# Altium PCB Altimeter_Board.PcbDoc
Units mm, origin at the board's own origin, x right, y up, seen from the top; angles counter-clockwise.
Board outline 30 x 17.5 mm, 4 copper layers (TOP, GND, PWR, BOTTOM), stack 1.021 mm thick; 50 components, 30 nets, 220 pads, 72 vias.
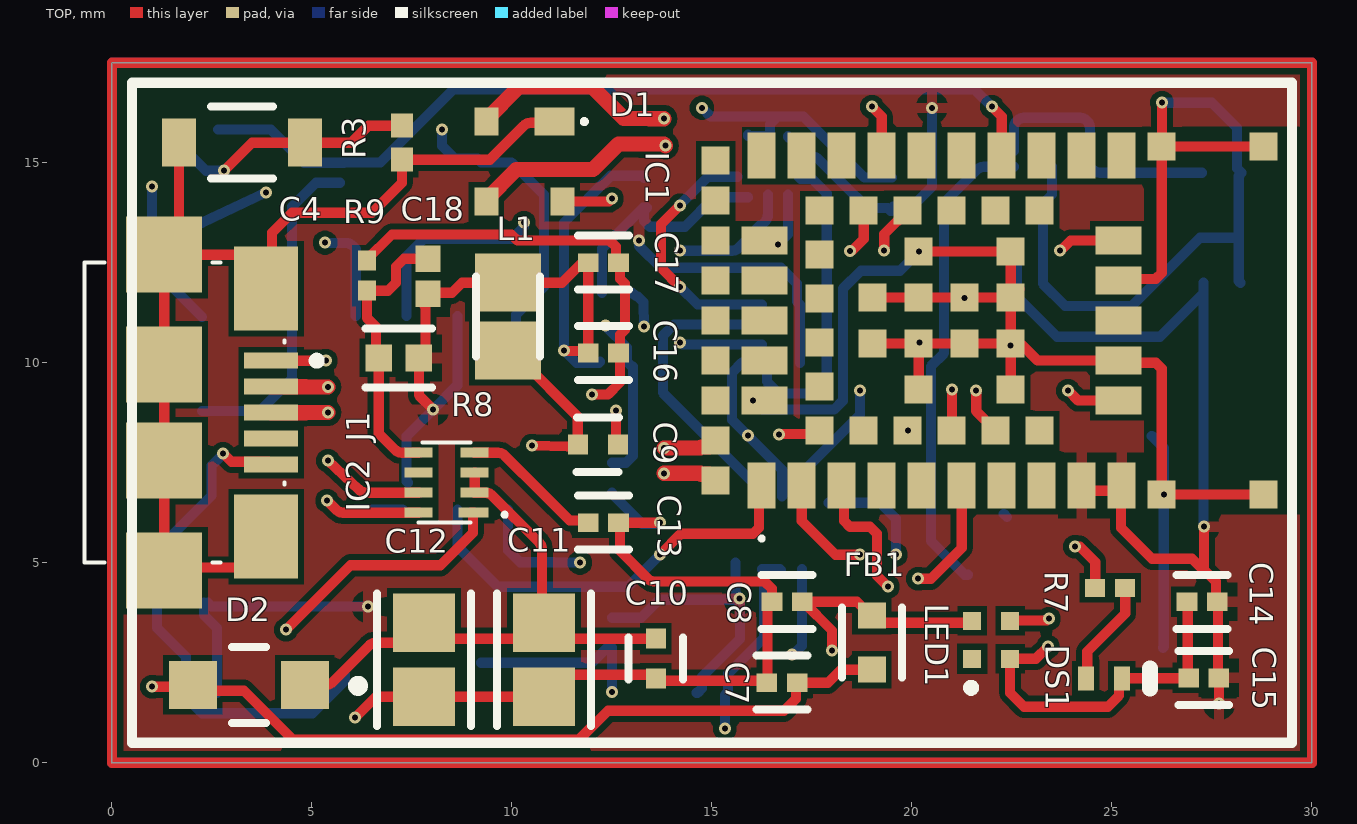
[diagram p0: TOP view]
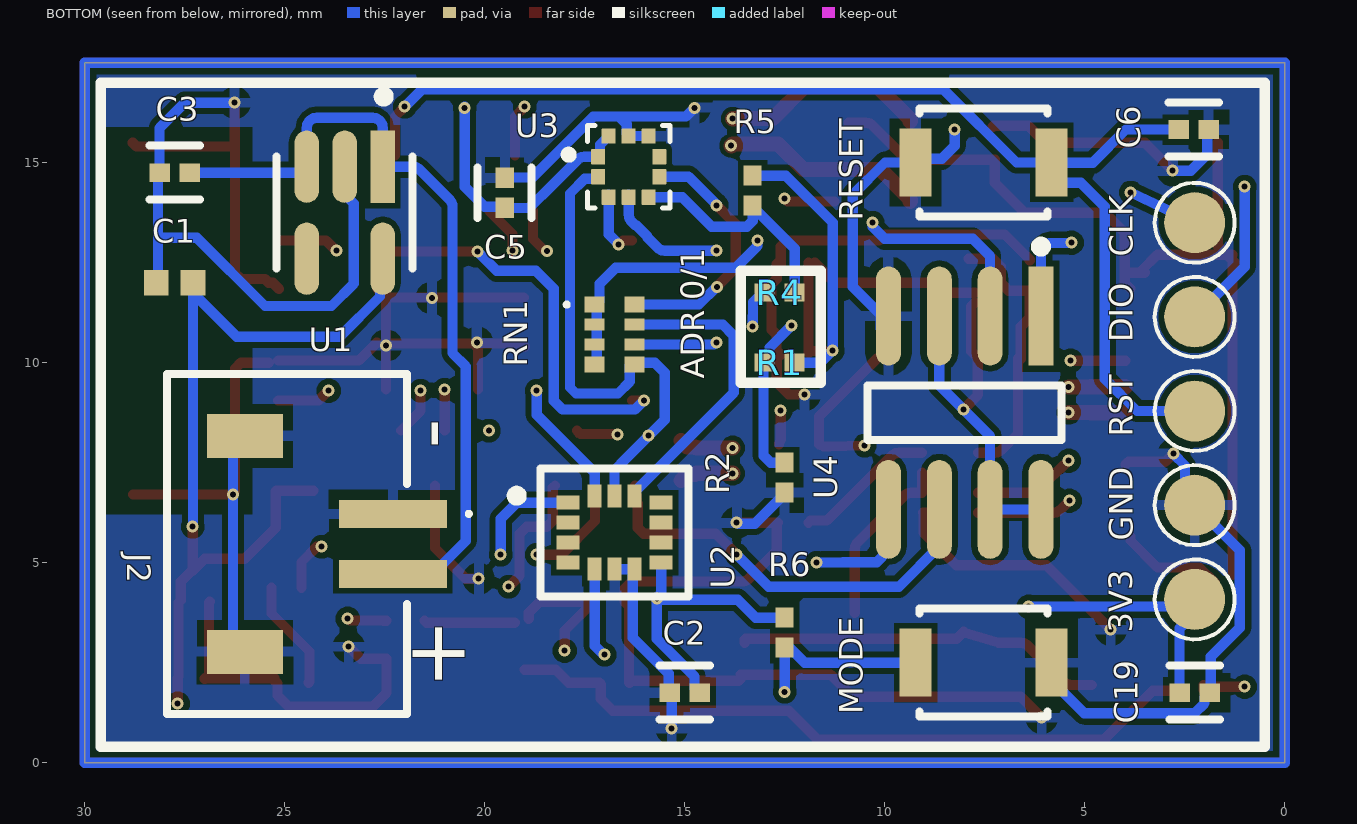
[diagram p1: BOTTOM view, seen from below]
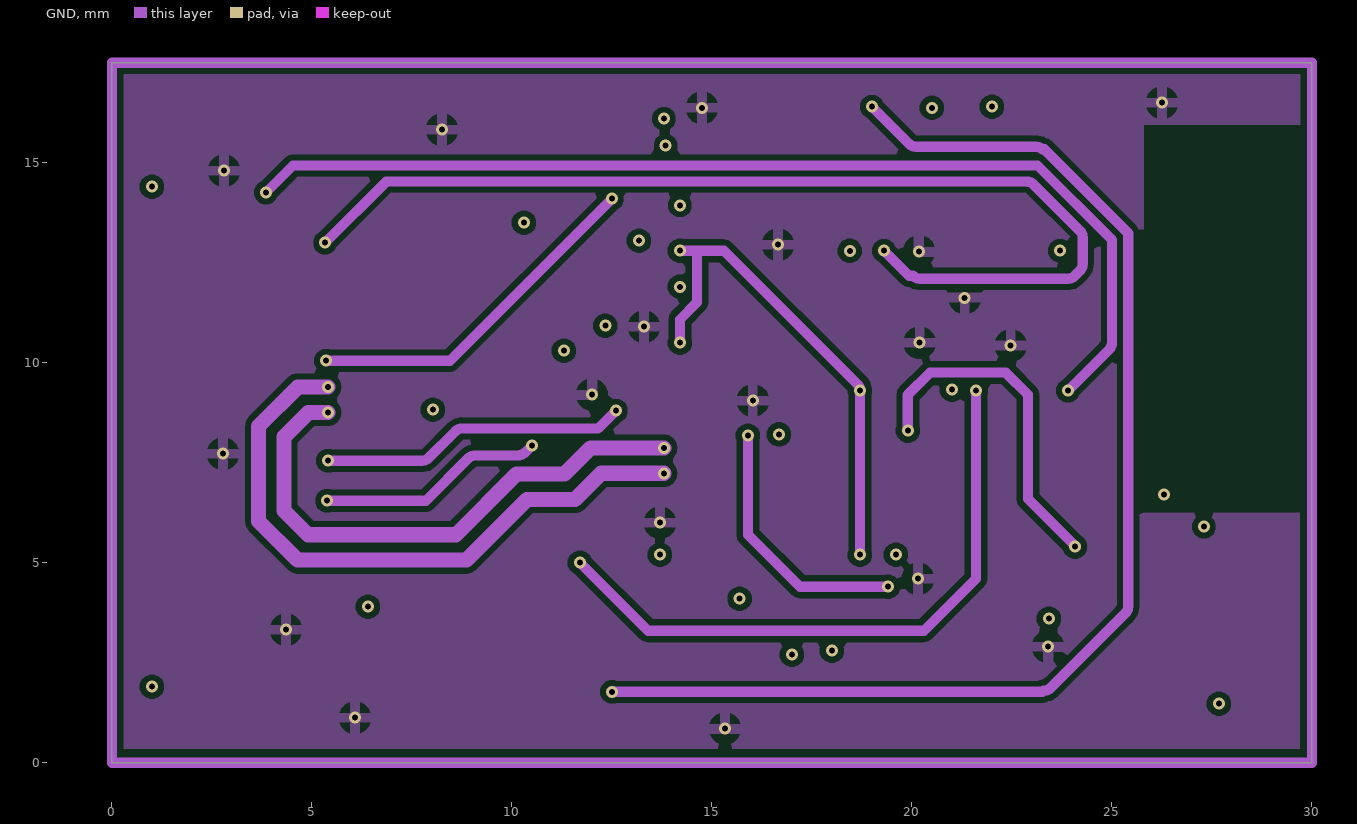
[diagram p2: GND]
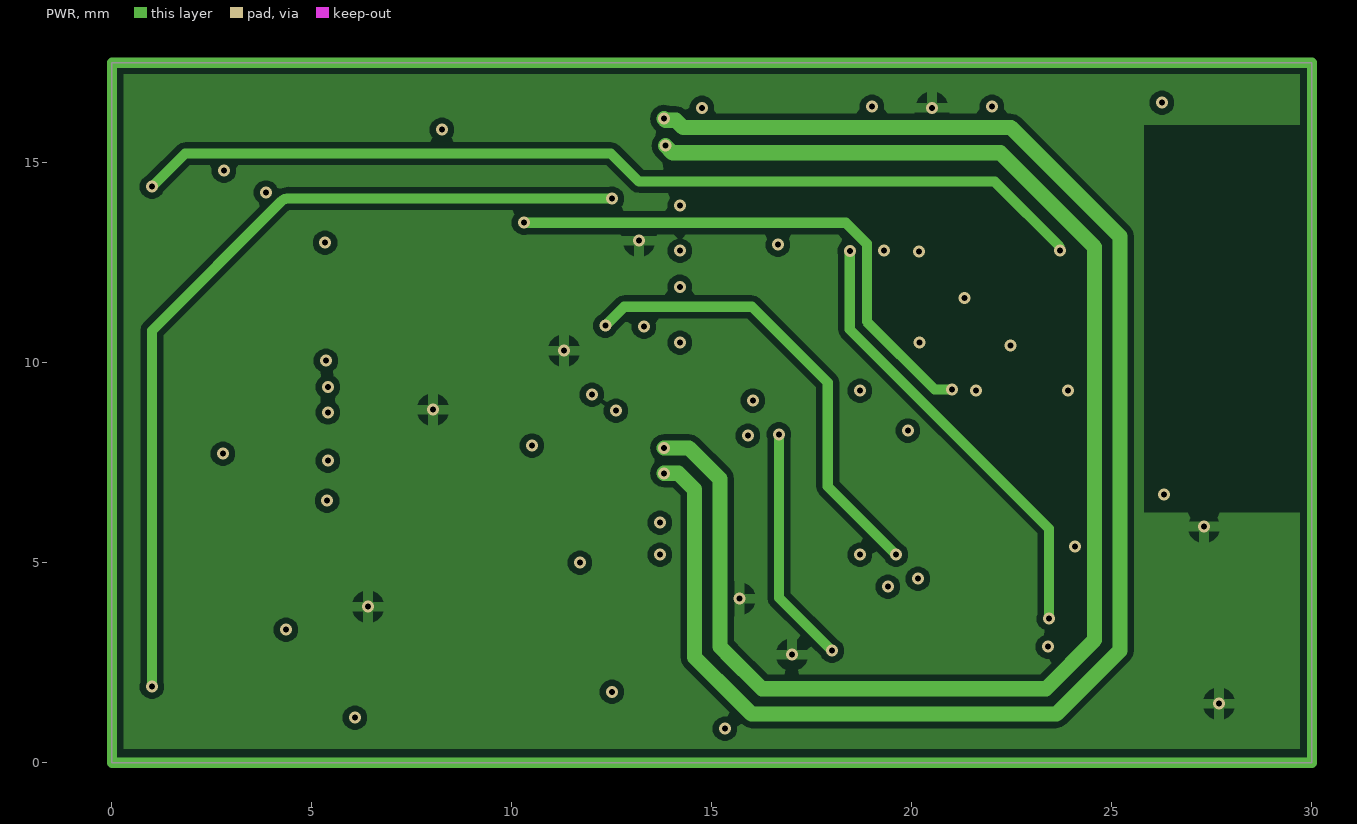
[diagram p3: PWR]
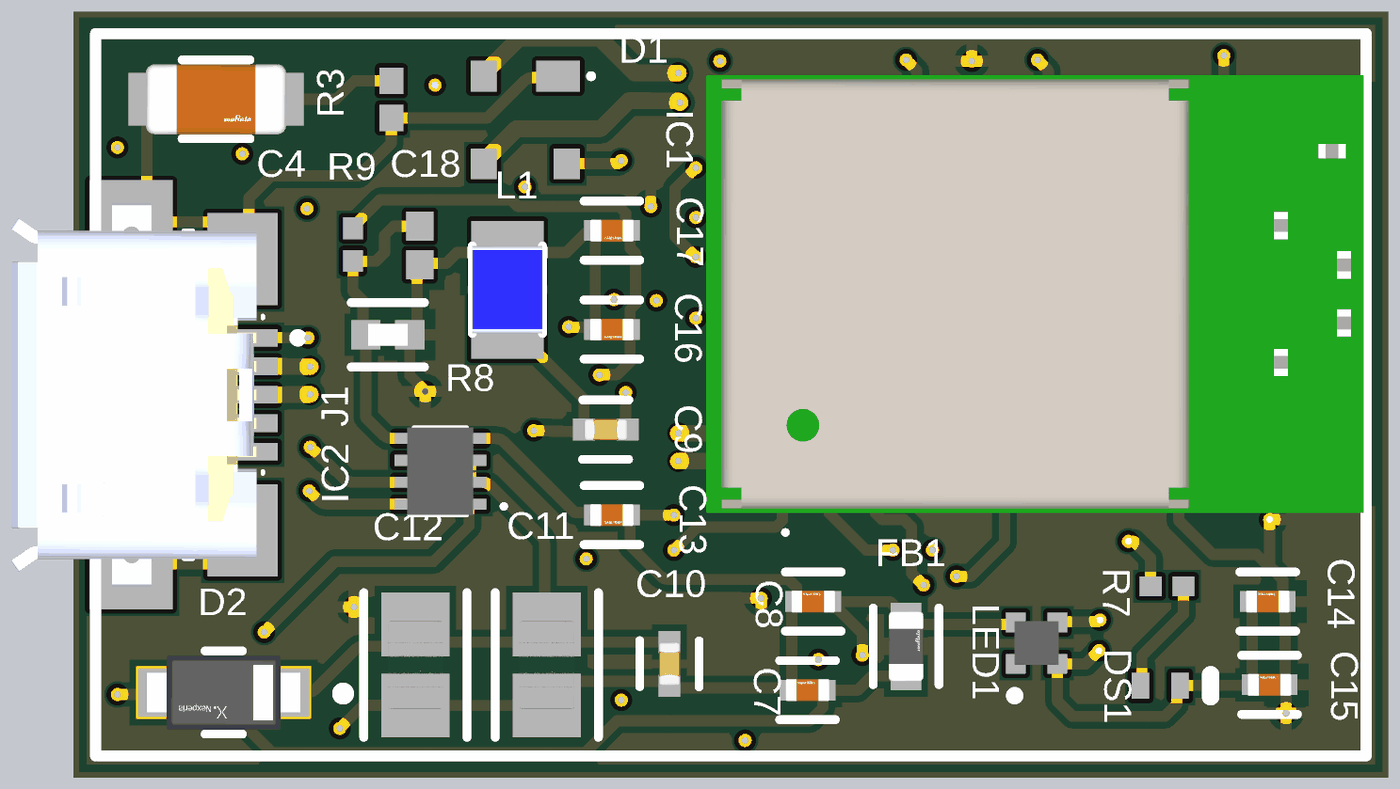
[diagram p4: 3D render of the assembled board from above, using the file's embedded part models]
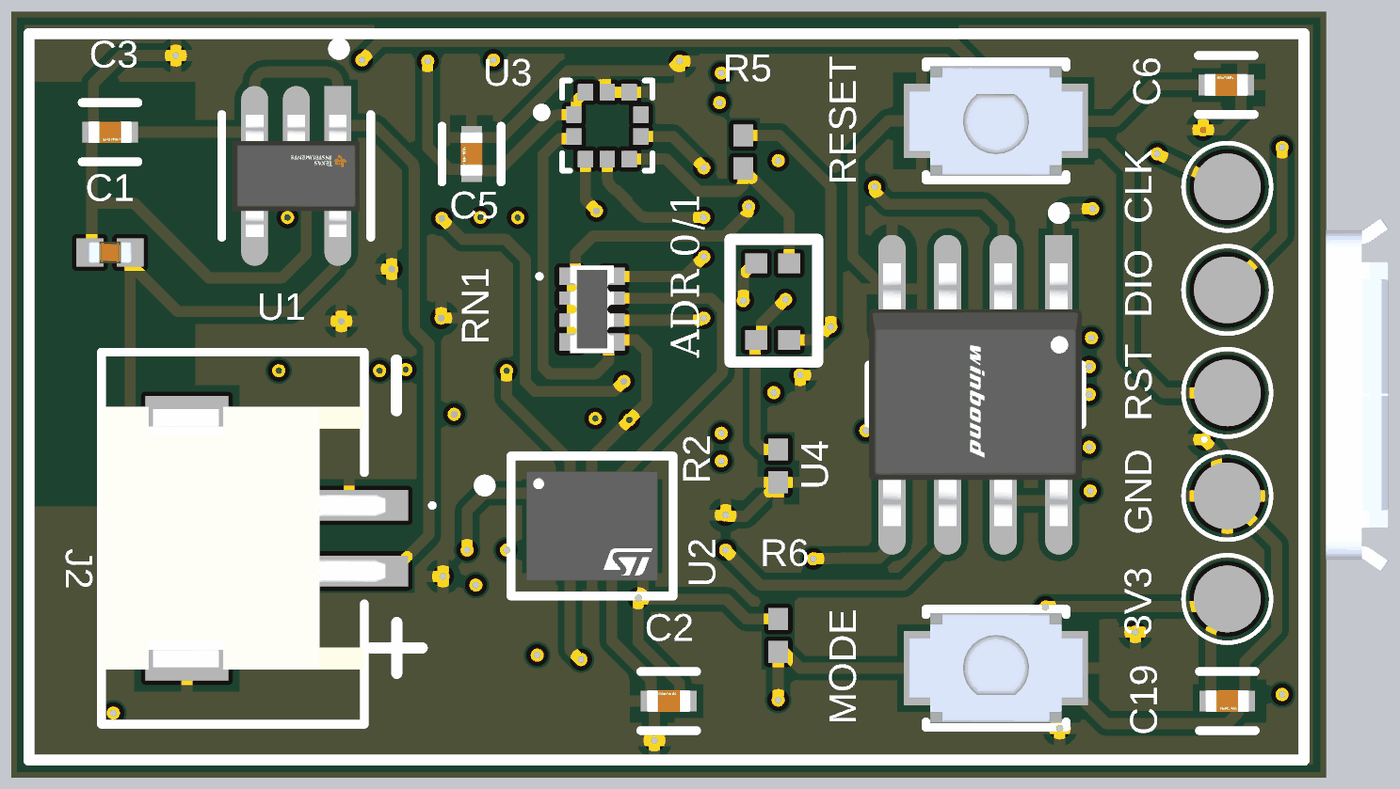
[diagram p5: 3D render of the assembled board from below, using the file's embedded part models]

## Layer stack, top to bottom
Top Solder: solder mask 0.0254, SM-001, Dk 4
TOP: signal copper 0.035
Dielectric 1: prepreg 0.2104, PP-017, Dk 4.4
GND: signal copper 0.0152
Dielectric 2: core 0.5, Core-039, Dk 4.6
PWR: signal copper 0.0152
Dielectric 3: prepreg 0.2104, PP-017, Dk 4.4
BOTTOM: signal copper 0.035
Bottom Solder: solder mask 0.0254, SM-001, Dk 4

## Board outline
0,0 0,17.5 30,17.5 30,0

## Design rules (kind name [scope] priority, off if disabled: settings)
Clearance [All] p1: gap=0.15 ignorepadtopadclearanceinfootprint=TRUE
DiffPairsRouting [All] p1: maxlimit=0.254 minlimit=0.254 mostfreqgap=0.254 toplayer_minwidth=0.381 toplayer_maxwidth=0.381 toplayer_prefwidth=0.381 midlayer1_minwidth=0.381 midlayer1_maxwidth=0.381 midlayer1_prefwidth=0.381 midlayer2_minwidth=0.381 midlayer2_maxwidth=0.381 midlayer2_prefwidth=0.381 bottomlayer_minwidth=0.381 bottomlayer_maxwidth=0.381 bottomlayer_prefwidth=0.381 maxuncoupledlength=12.7
MinimumSolderMaskSliver [All] p1: minsoldermaskwidth=0.1
PolygonConnect [All] p1: connectstyle=Relief reliefconductorwidth=0.254 reliefentries=4 polygonreliefangle="90 Angle" airgapwidth=0.254
RoutingVias [All] p1: holewidth=0.15 width=0.3 viastyle="Through Hole" minholewidth=0.15 minwidth=0.3 maxholewidth=0.15 maxwidth=0.3
SilkToSolderMaskClearance [IsPad] p1: minsilkscreentomaskgap=0.15 clearancetoexposedcopper=TRUE
SolderMaskExpansion [All] p1: expansion=0.102 istentingtop=FALSE
SupplyNets "Schematic Supply Nets_6" [InNet('VBAT')] p1: voltage=0.000
SupplyNets "Schematic Supply Nets_4" [InNet('VBUS')] p2: voltage=0.000
SupplyNets "Schematic Supply Nets_2" [InNet('VUSB')] p3: voltage=0.000
SupplyNets "Schematic Supply Nets_1" [InNet('GND')] p4: voltage=0.000
SupplyNets "Schematic Supply Nets" [InNet('+3V3')] p5: voltage=0.000
Width [All] p1: maxlimit=0.254 minlimit=0.254 preferedwidth=0.254
27 further rules are at their usual default settings.

## Classes and differential pairs
differential pair USB: +USB_P -USB_N

## Components (designator, comment, footprint, x,y, rotation, side; value= is the part's Value field where it differs from the comment)
3V3 "TP_1" TestPoint1 2.25,4.059 r90 bottom (schematic designator TP1)
C1 "CL05A225KO5NQNC" CAPC1005X60N 27.75,12 r180 bottom
C2 "CL05B104KA5NNNC" FP-CL830-IPC_C 15,1.75 r0 bottom
C3 "CL05B104KA5NNNC" FP-CL830-IPC_C 27.75,14.75 r180 bottom
C4 "GCJ31BR73A472KXJ1L" FP-GCJ31B-0_2-MFG 3.25,15.5 r0 top
C5 "CL05B104KA5NNNC" FP-CL830-IPC_C 19.5,14.25 r270 bottom
C6 "CL05B104KA5NNNC" FP-CL830-IPC_C 2.274,15.829 r0 bottom
C7 "CL05B102KB5NNND" FP-CL134-IPC_C 16.75,2 r180 top
C8 "CL05B102KB5NNND" FP-CL134-IPC_C 16.881,4.024 r180 top
C9 "CC0402KRX7R9BB104" FP-CC0402-MFG 12.147,7.954 r0 top value="100 nF"
C10 "CC0402KRX7R9BB104" FP-CC0402-MFG 13.6,2.6 r270 top value="100 nF"
C11 "CL21A106KAYNNNE" FP-CL21-IPC_A 10.8,2.574 r270 top
C12 "CL21A106KAYNNNE" FP-CL21-IPC_A 7.8,2.574 r270 top
C13 "CL05A105KA5NQNC" FP-CL542-IPC_C 12.285,6 r0 top
C14 "CL05B104KA5NNNC" FP-CL830-IPC_C 27.255,4.024 r180 top
C15 "CL05B104KA5NNNC" FP-CL830-IPC_C 27.296,2.121 r180 top
C16 "CL05A106MP8NUB8" FP-CL07-IPC_C 12.285,10.24 r0 top
C17 "CL05A106MP8NUB8" FP-CL07-IPC_C 12.285,12.5 r0 top
C18 "GRM1555C1H220JA01D" CAPC1005X55X25NL05T10 7.9,12.16 r270 top
C19 "CL05B104KA5NNNC" FP-CL830-IPC_C 2.25,1.75 r180 bottom
CLK "TP_1" TestPoint1 2.25,13.475 r90 bottom (schematic designator TP3)
D1 "PRTR5V0U2X,215" SOT143B 10.309,15.029 r180 top
D2 "PMEG6020AELRX" FP-SOD123W-MFG 3.426,1.946 r180 top
DIO "TP_1" TestPoint1 2.25,11.121 r90 bottom (schematic designator TP4)
DS1 "16-219A/T2D-AR2T1QY/3T" EVRL-0402-2_V 24.8,2.1 r0 top
FB1 "BLM18EG101TN1D" FP-BLM18-0_15-t0_5-MFG 19,3 r90 top
GND "TP_1" TestPoint1 2.25,6.413 r90 bottom (schematic designator TP2)
IC1 "NINA-B306-00B" NINAB30600B 21.945,11.053 r0 top
IC2 "MP2322GQH-Z" MP2322GQHZ 8.368,7 r180 top
J1 "ZX62-AB-5PA_31_" ZX62AB5PA31 1.97,8.75 r270 top locked
J2 "S2B-ZR-SM4A-TF_LF__SN_" S2BZRSM4ATFLFSN 24.947,5.471 r90 bottom
L1 "MAKK2016T3R3M" INDPM2016X100N 9.9,11.15 r270 top
LED1 "XL-1010RGBC-WS2812B" XL1010RGBCWS2812B 21.978,3.074 r90 top
MODE "B3U-1000P" FP-B3U-1000P-MFG 7.529,2.5 r0 bottom (schematic designator SW2)
R1 "RC0402FR-0710KL" RESC1005X40X25LL05T10 12.625,10 r180 bottom
R2 "RC0402FR-0710KL" RESC1005X40X25LL05T10 12.5,7.125 r90 bottom
R3 "RC0402FR-071ML" RESC1005X40X25NL05T10 7.25,15.5 r270 top
R4 "RC0402FR-0710KL" RESC1005X40X25LL05T10 12.625,11.75 r180 bottom
R5 "RC0402FR-0710KL" RESC1005X40X25LL05T10 13.3,14.3 r90 bottom
R6 "RC0402FR-0710KL" RESC1005X40X25LL05T10 12.5,3.25 r90 bottom
R7 "RC0402FR-07330RL" RESC1005X40X25LL05T10 24.956,4.374 r180 top
R8 "CRCW0402976KFKED" FP-CRCW0402-e3-IPC_A 7.171,10.12 r180 top
R9 "RC0402FR-07220KL" RESC1005X40X25LL05T10 6.374,12.181 r90 top
RESET "B3U-1000P" FP-B3U-1000P-MFG 7.529,15.007 r180 bottom (schematic designator SW1)
RN1 "CAY10-103J4LF" CAY10103J4LF 16.75,10.704 r270 bottom
RST "TP_1" TestPoint1 2.25,8.767 r90 bottom (schematic designator TP5)
U1 "TPS73033DBVT" FP-DBV0005A-IPC_A 23.5,13.75 r270 bottom
U2 "LSM6DSO32TR" FP-LGA-14L-DM00249496-MFG 16.75,5.75 r180 bottom
U3 "BMP388" PQFN50P200X200X80-10N 16.4,14.9 r180 bottom
U4 "W25Q16JVSNIQ TR" FP-W25Q16JVSNIQ_TR-IPC_A 8,8.75 r270 bottom

## Footprints (in the part's own frame and the unit in brackets; to place one, negate y for a bottom-side part, rotate by r counter-clockwise, add the part's x,y. Pads: shape width x height; smd on the part's side, far side on the other; paste and mask are expansions set on the pad)
CAPC1005X55X25NL05T10 [mm] "Chip Capacitor, 2-Leads, Body 1.00x0.50mm, IPC Medium Density"
  rect 0.66x0.62 smd: 1(-0.44,0) 2(0.44,0)
  body extent -0.53,-0.28 0.53,0.27, height 0.55
CAPC1005X60N [mm]
  rect 0.62x0.64 smd: 1(-0.46,0) 2(0.46,0)
  body extent -0.5,-0.25 0.5,0.25, height 0.6
CAY10103J4LF [mm]
  rect 0.4x0.5 smd: 1(-0.75,-0.5) 4(0.75,-0.5) 5(0.75,0.5) 8(-0.75,0.5)
  rect 0.3x0.5 smd: 2(-0.25,-0.5) 3(0.25,-0.5) 6(0.25,0.5) 7(-0.25,0.5)
  silkscreen extent -0.8,-1.25 -0.7,-1.15, body extent -1,-0.5 1,0.5, height 0.35
EVRL-0402-2_V [mm] "SMD, 2-Leads, Body 1x0.5mm"
  rect 0.4x0.6 smd: 1(-0.45,0) 2(0.45,0)
  silkscreen extent 1.15,-0.25 1.15,0.25, body extent -0.5,-0.25 0.5,0.25, height 0.25
FP-B3U-1000P-MFG [mm]
  rect 0.8x1.7 smd paste+0 mask+0: 1(-1.7,0) 2(1.7,0)
  silkscreen extent -1.6,-1.35 1.6,1.35, body extent -2,-1.26 2,1.24, height 1.6
FP-BLM18-0_15-t0_5-MFG [mm]
  rect 0.65x0.7 smd paste+0 mask+0: 1(-0.675,0) 2(0.675,0)
  silkscreen extent -0.87,-0.75 0.87,0.75, body extent -1.1,-0.58 1.1,0.58, height 0.25
FP-CC0402-MFG [mm]
  rect 0.5x0.5 smd paste+0 mask+0: 1(-0.5,0) 2(0.5,0)
  silkscreen extent -0.53,-0.68 0.53,0.67, body extent -0.87,-0.48 0.87,0.48, height 0.25
FP-CL07-IPC_C [mm]
  rect 0.515x0.472 smd paste+0 mask+0: 1(-0.379,0) 2(0.379,0)
  silkscreen extent -0.64,-0.67 0.64,0.67, body extent -0.74,-0.38 0.74,0.38, height 0.25
FP-CL21-IPC_A [mm]
  rect 1.455x1.556 smd paste+0 mask+0: 1(-0.926,0) 2(0.926,0)
  silkscreen extent -1.65,-1.18 1.65,1.18, body extent -2.15,-1.28 2.15,1.28, height 0.25
FP-CL134-IPC_C [mm]
  rect 0.515x0.472 smd paste+0 mask+0: 1(-0.379,0) 2(0.379,0)
  silkscreen extent -0.64,-0.67 0.64,0.67, body extent -0.74,-0.38 0.74,0.38, height 0.25
FP-CL542-IPC_C [mm]
  rect 0.515x0.472 smd paste+0 mask+0: 1(-0.379,0) 2(0.379,0)
  silkscreen extent -0.64,-0.67 0.64,0.67, body extent -0.74,-0.38 0.74,0.38, height 0.25
FP-CL830-IPC_C [mm]
  rect 0.515x0.472 smd paste+0 mask+0: 1(-0.379,0) 2(0.379,0)
  silkscreen extent -0.64,-0.67 0.64,0.67, body extent -0.5,-0.25 0.5,0.25, height 0.55
FP-CRCW0402-e3-IPC_A [mm]
  rect 0.668x0.672 smd paste+0 mask+0: 1(-0.502,0) 2(0.502,0)
  silkscreen extent -0.84,-0.74 0.84,0.74, body extent -1.04,-0.54 1.04,0.54, height 0.25
FP-DBV0005A-IPC_A [mm]
  rect 1.805x0.612 smd paste+0 mask+0: 1(-1.15,0.95)
  rrect100% 1.805x0.612 smd paste+0 mask+0: 2(-1.15,0) 3(-1.15,-0.95) 4(1.15,-0.95) 5(1.15,0.95)
  silkscreen extent -3.03,-1.7 1.4,1.7, body extent -1.4,-1.45 1.4,1.45, height 1.45
FP-GCJ31B-0_2-MFG [mm]
  rect 0.85x1.2 smd paste+0 mask+0: 1(-1.575,0) 2(1.575,0)
  silkscreen extent -0.77,-0.9 0.77,0.9, body extent -2.1,-1 2.1,1, height 0.25
FP-LGA-14L-DM00249496-MFG [mm]
  rect 0.575x0.35 smd paste-1000 mask+0: 1(-1.162,0.75) 2(-1.162,0.25) 3(-1.162,-0.25) 4(-1.162,-0.75) 8(1.162,-0.75) 9(1.162,-0.25) 10(1.162,0.25) 11(1.162,0.75)
  rect 0.35x0.575 smd paste-1000 mask+0: 5(-0.5,-0.913) 6(0,-0.913) 7(0.5,-0.913) 12(0.5,0.913) 13(0,0.913) 14(-0.5,0.913)
  silkscreen extent -2.58,-1.6 1.85,1.6, body extent -1.5,-1.25 1.5,1.25, height 0.86
FP-SOD123W-MFG [mm]
  rect 1.2x1.2 smd paste-1000 mask+0: 1(-1.4,0) 2(1.4,0)
  silkscreen extent -2.85,-0.95 0.43,0.95, body extent -2.2,-1.05 2.2,1.05, height 0.25
FP-W25Q16JVSNIQ_TR-IPC_A [mm]
  rect 2.474x0.623 smd paste+0 mask+0: 1(-2.416,1.905)
  rrect100% 2.474x0.623 smd paste+0 mask+0: 2(-2.416,0.635) 3(-2.416,-0.635) 4(-2.416,-1.905) 5(2.416,-1.905) 6(2.416,-0.635) 7(2.416,0.635) 8(2.416,1.905)
  silkscreen extent -4.28,-2.42 0.68,2.42, body extent -3,-2.42 3,2.42, height 1.75
INDPM2016X100N [mm]
  rect 1.45x1.65 smd: 1(-0.85,0) 2(0.85,0)
  silkscreen extent -1,-0.8 1,0.8, body extent -1,-0.8 1,0.8, height 1
MP2322GQHZ [mm]
  rect 0.75x0.25 smd: 1(-0.675,0.75)
  rect 0.7x0.25 smd: 2(-0.7,0.25) 3(-0.7,-0.25) 4(-0.7,-0.75) 5(0.7,-0.75) 6(0.7,-0.25) 7(0.7,0.25) 8(0.7,0.75)
  silkscreen extent -1.5,-1 0.7,1, body extent -0.75,-1 0.75,1, height 1
NINAB30600B [mm]
  rect 0.7x1.15 smd: 1(-5.7,-4.125) 2(-4.7,-4.125) 3(-3.7,-4.125) 4(-2.7,-4.125) 5(-1.7,-4.125) 6(-0.7,-4.125) 7(0.3,-4.125) 8(1.3,-4.125) 9(2.3,-4.125) 10(3.3,-4.125) 16(3.3,4.125) 17(2.3,4.125) 18(1.3,4.125) 19(0.3,4.125) 20(-0.7,4.125) 21(-1.7,4.125) 22(-2.7,4.125) 23(-3.7,4.125) 24(-4.7,4.125) 25(-5.7,4.125)
  rect 1.15x0.7 smd: 11(3.225,-2) 12(3.225,-1) 13(3.225,0) 14(3.225,1) 15(3.225,2) 26(-5.625,2) 27(-5.625,1) 28(-5.625,0) 29(-5.625,-1) 30(-5.625,-2)
  rect 0.7x0.7 smd: 31(-4.25,-2.75) 32(-3.15,-2.75) 33(-2.05,-2.75) 34(-0.95,-2.75) 35(0.15,-2.75) 36(1.25,-2.75) 37(1.25,2.75) 38(0.15,2.75) 39(-0.95,2.75) 40(-2.05,2.75) 41(-3.15,2.75) 42(-4.25,2.75) 43(-4.25,1.65) 44(-4.25,0.55) 45(-4.25,-0.55) 46(-4.25,-1.65) 47(-6.85,4) 48(-6.85,3) 49(-6.85,2) 50(-6.85,1) 51(-6.85,0) 52(-6.85,-1) 53(-6.85,-2) 54(-6.85,-3) 55(-6.85,-4) 56(-2.925,0.575) 57(-2.925,-0.575) 58(-1.775,-1.725) 59(-1.775,-0.575) 60(-1.775,0.575) 61(-1.775,1.725) 62(-0.625,0.575) 63(-0.625,-0.575) 64(0.525,-1.725) 65(0.525,-0.575) 66(0.525,0.575) 67(0.525,1.725) 68(4.3,-4.35) 69(6.85,-4.35) 70(4.3,4.35) 71(6.85,4.35)
  silkscreen extent -5.75,-5.5 7.5,3.6, body extent -7.5,-5 7.5,5, height 2.63
PQFN50P200X200X80-10N [mm]
  rrect9% 0.35x0.38 smd: 1(-0.765,0.25) 2(-0.765,-0.25) 3(-0.5,-0.765) 4(0,-0.765) 5(0.5,-0.765) 6(0.765,-0.25) 7(0.765,0.25) 8(0.5,0.765) 9(0,0.765) 10(-0.5,0.765)
  silkscreen extent -1.6,-1.03 1.03,1.03
RESC1005X40X25LL05T10 [mm] "Chip Resistor, 2-Leads, Body 1.00x0.50mm, IPC High Density"
  rect 0.5x0.45 smd: 1(-0.375,0) 2(0.375,0)
  body extent -0.53,-0.27 0.53,0.28, height 0.4
RESC1005X40X25NL05T10 [mm] "Chip Resistor, 2-Leads, Body 1.00x0.50mm, IPC Medium Density"
  rect 0.6x0.55 smd: 1(-0.425,0) 2(0.425,0)
  body extent -0.53,-0.27 0.53,0.28, height 0.4
S2BZRSM4ATFLFSN [mm]
  rect 0.7x2.7 smd: 1(0.75,-2.65) 2(-0.75,-2.65)
  rect 1.1x1.9 smd: 3(2.7,1.05) 4(-2.7,1.05)
  silkscreen extent -4.25,-4.6 4.25,3, body extent -3,-3.48 3,3.02, height 3.7
SOT143B [mm]
  rect 1x0.7 smd: 1(-0.75,-1)
  rect 0.6x0.7 smd: 2(0.95,-1) 3(0.95,1) 4(-0.95,1)
  silkscreen extent -1.55,-1.05 -1.45,-0.95
TestPoint1 [mil]
  round 60 smd: TP1(1,0)
  silkscreen extent -38,-39 40,39
XL1010RGBCWS2812B [mm]
  rect 0.45x0.45 smd: 1(-0.475,0.475) 2(0.475,0.475) 3(-0.475,-0.475) 4(0.475,-0.475)
  silkscreen extent -1.3,0.4 -1.1,0.6, body extent -0.5,-0.5 0.5,0.5, height 0.9
ZX62AB5PA31 [mm]
  rect 0.4x1.35 smd: 1(-1.3,2.013) 2(-0.65,2.013) 3(0,2.013) 4(0.65,2.013) 5(1.3,2.013)
  rect 2.1x1.6 smd: MP1(-3.1,1.887) MP2(3.1,1.887)
  rect 1.9x1.9 smd: MP3(-3.95,-0.662) MP4(-1.2,-0.662) MP5(1.2,-0.662) MP6(3.95,-0.662)
  silkscreen extent -3.75,-2.65 3.75,3.25, body extent -4.4,-3.4 4.4,2.2, height 2.78

## Part data
3V3 CLK DIO GND RST: library part TESTPOINT1
C1: "Capacitor", Manufacturer_Name=SAMSUNG, Mouser Part Number=N/A, Arrow Part Number=CL05A225KO5NQNC, Arrow Price/Stock=https://www.arrow.com/en/products/cl05a225ko5nqnc/samsung-electro-mechanics, Datasheet Link=https://product.samsungsem.com/mlcc/CL05A225KO5NQN.do, Height=0.6mm, Manufacturer_Part_Number=CL05A225KO5NQNC, Mouser Price/Stock=https://www.mouser.com/Search/Refine.aspx?Keyword=N%2FA
C2 C3 C5 C6 C14 C15 C19: library part CMP-13271-001643-1, "Cap Ceramic 100nF 25V X7R ±10% SMD 0402 +125°C Paper T/R", Capacitance=100nF, Case Code (Imperial)=0402, Case Code (Metric)=1005, Max Operating Temperature=125°C, Min Operating Temperature=-55°C, Tolerance=10%, Voltage Rating=25V, Case/Package=0402, Length=0.039inch, Mount="Surface Mount", Packaging="Tape and Reel", Thickness=0.022inch, Voltage Rating (DC)=25V, Width=0.02inch
C4: library part CMP-06035-022072-1, "4700pF ±10%  1kV Ceramic Capacitor X7R 1206 (3216 Metric)", Capacitance=4.7nF, Case/Package=1206, Dielectric=X7R, Max Operating Temperature=125°C, Min Operating Temperature=-55°C, Ratings=AEC-Q200, Tolerance=10%, Voltage Rating=1kV, Depth=1.6mm, Features="Soft Termination", Length=0.126inch, Mount="Surface Mount", Packaging="Tape and Reel", Thickness=0.061inch, Width=0.063inch
C7 C8: library part CMP-13271-004684-1, "Cap Ceramic 1nF 50V X7R ±10% SMD 0402 +125°C Paper T/R", Capacitance=1nF, Case/Package=0402, Dielectric=X7R, Max Operating Temperature=125°C, Min Operating Temperature=-55°C, Package Quantity=50000, Tolerance=10%, Voltage=50V, Construction=Flat, Depth=0.5mm, Height=0.5mm, Length=1mm, Mount="Surface Mount", Packaging="Tape and Reel", Radiation Hardening=No, RoHS Compliant=Yes, Series=CL, Thickness=0.022inch, Voltage Rating=50V, Voltage Rating (DC)=50V, Width=0.02inch
C9 C10: library part CMP-03422-001010-1, "CAP CER 0.1UF 50V X7R 0402", Capacitance="100 nF", Manufacturer=YAGEO, Package=CC0402, Temperature="-55°C to +125°C", Temperature Characteristic=X7R, Temperature Coefficient=30ppm/°C, Temperature Range High=+125°C, Temperature Range Low=-55°C, Tolerance=0.1, Voltage Rating="50 V", Automotive=No, Automotive Grade=NA, Category=Cap, ComponentLink2Description=Datasheet, ComponentLink2URL=http://www.yageo.com/documents/recent/UPY-GP_NP0_16V-to-50V_16.pdf, Device Class L1="Passive Components", Device Class L2=Capacitors, Device Class L3="Ceramic Capacitors", Digikey Description="CAP CER 0.1UF 50V X7R 0402", Footprint Url=http://www.yageo.com/exep/pages/download/literatures/UPY-C_GEN_24.pdf, Height=0.55mm, Ipc Land Pattern Name=CAPC10050X50, Lead Free=Yes, Manufacturer Part Number=CC0402KRX7R9BB104, Material=Ceramic, Octopart=https://octopart.com/cc0402krx7r9bb104-yageo-56536067, RoHS=TRUE
C11 C12: library part CMP-13271-002975-1, "CL21 Series 0805 10uF 25V ±10% Tolerance X5R Multilayer Ceramic Chip Capacitor", Capacitance=10uF, Case Code (Imperial)=0805, Case Code (Metric)=2012, Dielectric=X5R, Max Operating Temperature=85°C, Min Operating Temperature=-55°C, Package Quantity=1, Tolerance=10%, Voltage Rating=25V, Case/Package=0805, Depth=1.25mm, Height=1.25mm, Length=2mm, Mount="Surface Mount", Packaging="Tape and Reel", Radiation Hardening=No, Thickness=0.057inch, Width=0.049inch
C13: library part CMP-13271-001051-1, "Cap Ceramic 1uF 25V X5R ±10% SMD 0402 +85°C Paper T/R", Capacitance=1uF, Case Code (Imperial)=0402, Case Code (Metric)=1005, Dielectric=X5R, Max Operating Temperature=85°C, Min Operating Temperature=-55°C, Package Quantity=10000, Tolerance=10%, Voltage Rating=25V, Case/Package=0402, Depth=0.5mm, Height=0.5mm, Lead Free="Lead Free", Length=1mm, Material=Ceramic, Mount="Surface Mount", Packaging="Tape and Reel", Radiation Hardening=No, Thickness=0.022inch, Width=0.02inch
C16 C17: library part CMP-13271-002778-1, "Cap Ceramic 10uF 10V X5R ±20% SMD 0402 +85°C Paper T/R", Capacitance=10uF, Case Code (Imperial)=0402, Case Code (Metric)=1005, Max Operating Temperature=85°C, Min Operating Temperature=-55°C, Tolerance=20%, Voltage Rating=10V, Case/Package=0402, Length=0.039inch, Mount="Surface Mount", Packaging="Tape and Reel", Thickness=0.035inch, Width=0.02inch
C18: library part CMP-2008-04302-1, Manufacturer=Murata, Part Number=GRM1555C1H220JA01D
D1: "Ultra low capacitance double rail-to-rail ESD protection diode", Package=None, Availability=Unavailable, MP=PRTR5V0U2X,215, Price=None
D2: library part CMP-14398-000040-1, "DIODE SCHOTTKY 60V 2A CFP3", RoHS Compliant=Yes
DS1: library part CMP-2100-03575-1, "Chip LED, White, 5 V, 10 mA, 30 mW, -40 to 85 degC, 2-Pin SMD (0402), RoHS, Tape and Reel", Case/Package=0402, Forward Current=5mA, Forward Voltage=2.6V, Illumination Colour=White, Lens Colour=Yellow, Manufacturer="Everlight Electronics", Max Operating Temperature=85degC, Min Operating Temperature=-40degC, Package Description="2-Pin Surface Mount Device, Body 1 x 0.5 mm", Package Quantity=3000, Power Rating=30mW, Datasheet URL=http://www.everlight.com/file/ProductFile/16-219A-T2D-AR2T1QY-3T.pdf, Datasheet Version="Rev. 5, 04/2013", Luminous Intensity=360mcd, Manufacturer URL=http://www.everlight.com/, Mount=Standard, Package Reference=0402, Packaging=TapeandReel, RoHSCompliant=true, Viewing Angle=130degrees
FB1: library part CMP-0686-00530-3, "Chip Ferrite Bead, 0603, 100Ω @ 100MHz, 25%, 0.045Ω, 2A", Case Code (Imperial)=0603, Case Code (Metric)=1608, Current Rating=2A, DC Resistance (DCR)=45mR, Max Operating Temperature=125°C, Min Operating Temperature=-55°C, Package Quantity=1, Test Frequency=100MHz, Tolerance=25%, Case/Package=0603, Contact Plating=Tin, Core Material=Ferrite, Depth=0.8mm, Height=0.8mm, Impedance=100R, Lead Free="Lead Free", Length=1.6mm, Material=Ferrite, Max Current Rating=2A, Max DC Current=2A, Number of Circuits=1, Number of Lines=1, Number of Pins=2, Packaging="Tape and Reel", REACH SVHC="No SVHC", Termination=SMD/SMT, Width=0.8mm
IC1: "Integrated Circuit", Manufacturer_Name=u-blox, Mouser Part Number=377-NINA-B306-00B, Arrow Part Number=NINA-B306-00B, Arrow Price/Stock=https://www.arrow.com/en/products/nina-b306-00b/u-blox?utm_currency=USD&region=nac, Datasheet Link=https://www.u-blox.com/en/docs/UBX-17052099, Manufacturer_Part_Number=NINA-B306-00B, Mouser Price/Stock=https://www.mouser.co.uk/ProductDetail/u-blox/NINA-B306-00B?qs=zW32dvEIR3uPiIbgcFbQtQ%3D%3D
IC2: "Integrated Circuit", Manufacturer_Name="Monolithic Power Systems (MPS)", Mouser Part Number=946-MP2322GQH-Z, Height=0.9mm, Manufacturer_Part_Number=MP2322GQH-Z, Mouser Price/Stock=https://www.mouser.co.uk/ProductDetail/Monolithic-Power-Systems-MPS/MP2322GQH-Z?qs=byeeYqUIh0PNRfOYikm40g%3D%3D
J1: "Connector", Arrow Part Number=ZX62-AB-5PA(31), Manufacturer_Name=Hirose, Mouser Part Number=798-ZX62-AB-5PA31, Arrow Price/Stock=https://www.arrow.com/en/products/zx62-ab-5pa-31/hirose-electric, Datasheet Link=https://componentsearchengine.com/Datasheets/1/ZX62-AB-5PA(31).pdf, Height=2.8mm, Manufacturer_Part_Number=ZX62-AB-5PA(31), Mouser Price/Stock=https://www.mouser.co.uk/ProductDetail/Hirose-Connector/ZX62-AB-5PA31?qs=4J5DPWWS9ECs22kuZOYOxg%3D%3D
J2: "Connector", Arrow Part Number=S2B-ZR-SM4A-TF(LF)(SN), Manufacturer_Name="JST (JAPAN SOLDERLESS TERMINALS)", Mouser Part Number=306-S2BZRSM4ATFLFSN, Arrow Price/Stock=https://www.arrow.com/en/products/s2b-zr-sm4a-tf-lf-sn/jst-manufacturing?region=europe, Datasheet Link=https://www.jst-mfg.com/product/pdf/eng/eZH.pdf, Height=3.7mm, Manufacturer_Part_Number=S2B-ZR-SM4A-TF(LF)(SN), Mouser Price/Stock=https://www.mouser.co.uk/ProductDetail/JST-Commercial/S2B-ZR-SM4A-TFLFSN?qs=QpmGXVUTftFg0hrqdkvc8w%3D%3D
L1: "Inductor", Manufacturer_Name="TAIYO YUDEN", Mouser Part Number=963-MAKK2016T3R3M, Datasheet Link=https://mouser.componentsearchengine.com/Datasheets/1/MAKK2016T3R3M.pdf, Height=1mm, Manufacturer_Part_Number=MAKK2016T3R3M, Mouser Price/Stock=https://www.mouser.co.uk/ProductDetail/TAIYO-YUDEN/MAKK2016T3R3M?qs=Z6svWd%2FY2UTQY1%2FASu%252BfUw%3D%3D
LED1: "LED", Manufacturer_Name=XINGLIGHT, Datasheet Link=https://datasheet.lcsc.com/lcsc/2301111010_XINGLIGHT-XL-1010RGBC-WS2812B_C5349953.pdf, Height=0.8mm, Manufacturer_Part_Number=XL-1010RGBC-WS2812B
MODE RESET: library part CMP-2100-03586-2, "SWITCH TACTILE SPST-NO 0.05A 12V", Contact Current Rating=50mA, Contact Resistance=100mR, Insulation Resistance=100MR, Max Operating Temperature=70°C, Max Voltage Rating (DC)=12V, Min Operating Temperature=-25°C, Operating Force=1.5N, Package Quantity=1, Ratings="Dust Proof", Actuator Length=0.4mm, Actuator Type=Standard, Contact Material=Silver, Current Rating=50mA, Depth=2.5mm, Electrical Life=200000Cycles, Height=1.2mm, Illumination Type=Non-Illuminated, Lead Free="Lead Free", Length=4mm, Max Current Rating=50mA, Mechanical Life=200000Cycles, Mount="Surface Mount", Orientation=Straight, Packaging="Tape and Reel", Switch Function=Off-Mom, Switch Travel=0.15mm, Termination=SMD/SMT, Throw Configuration=SPST, Voltage Rating (DC)=12V, Weight=0.000776oz, Width=3mm
R1 R2 R4 R5 R6: library part CMP-2002-07353-1, Manufacturer="Yageo / Phycomp", Part Number=RC0402FR-0710KL
  R1 R4: Mount="*DO NOT MOUNT"
R3: library part CMP-2002-07490-1, Manufacturer="Yageo / Phycomp", Part Number=RC0402FR-071ML
R7: library part CMP-2002-07613-1, Manufacturer="Yageo / Phycomp", Part Number=RC0402FR-07330RL
R8: library part CMP-2002-00281-4, "RES Thick Film, 976kΩ, 1%, 0.063W, 100ppm/°C, 0402", Case Code (Imperial)=0402, Case Code (Metric)=1005, Max Operating Temperature=155°C, Max Power Dissipation=63mW, Min Operating Temperature=-55°C, Package Quantity=10, Resistance=976kR, Temperature Coefficient=100ppm/°C, Tolerance=1%, Voltage Rating=50V, Case/Package=0402, Composition="Thick Film", Contact Plating=Tin, Depth=0.5mm, Features="Automotive AEC-Q200", Height=0.016inch, Lead Free="Lead Free", Length=1mm, Military Standard=Not, Number of Pins=2, Number of Terminations=2, Packaging="Tape and Reel", Power Rating=63mW, Radiation Hardening=No, Voltage Rating (DC)=50V, Weight=2.3E-05oz, Width=0.5mm
R9: library part CMP-1011-00772-2, Manufacturer="Yageo / Phycomp", Part Number=RC0402FR-07220KL
RN1: "Resistor Network", Manufacturer_Name=Bourns, Mouser Part Number=652-CAY10-103J4LF, Arrow Part Number=CAY10-103J4LF, Arrow Price/Stock=https://www.arrow.com/en/products/cay10-103j4lf/bourns?region=europe, Datasheet Link=https://www.bourns.com/pdfs/CAY10.pdf, Height=0.45mm, Manufacturer_Part_Number=CAY10-103J4LF, Mouser Price/Stock=https://www.mouser.co.uk/ProductDetail/Bourns/CAY10-103J4LF?qs=FaUPen95qPYx83jflZJwIw%3D%3D
U1: library part CMP-04917-000130-1, "IC REG LINEAR 3.3V 200MA SOT23-5", Case/Package=SOT-23, Dropout Voltage=120mV, Input Bias Current=170uA, Max Input Voltage=5.5V, Max Operating Temperature=85°C, Max Output Current=200mA, Max Output Voltage=3.3V, Max Power Dissipation=560mW, Min Current Limit=285mA, Min Input Voltage=2.7V, Min Operating Temperature=-40°C, Output Voltage Accuracy=2%, Package Quantity=250, Accuracy=2%, Contact Plating=Gold, Height=1.15mm, Lead Free="Lead Free", Length=2.9mm, Max Supply Voltage=5.5V, Min Supply Voltage=2.7V, Mount="Surface Mount", Nominal Output Voltage=3.3V, Number of Outputs=1, Number of Pins=5, Number of Regulators=1, Output Current=200mA, Output Type=Fixed, Output Voltage=3.3V, Packaging="Tape and Reel", Polarity=Positive, Power Dissipation=560mW, Power Rating=560mW, Quiescent Current=170uA, Radiation Hardening=No, REACH SVHC="No SVHC", RoHS Compliant=Yes, Series=-, Termination=SMD/SMT, Width=1.6mm
U2: library part CMP-12177-000015-1, "INEMO INERTIAL MODULE: 3D ACCELE"
U3: "P-Sensor SPI I2C 1, 25 Bar SMD", Package=None, Availability=Unavailable, MP=BMP388, Price=None
U4: library part CMP-78876-000009-2, "IC FLASH 16MBIT SPI/QUAD 8SOIC", Ambient Temperature Range High=85°C, Max Supply Voltage=3.6V, Min Operating Temperature=-40°C, Min Supply Voltage=2.7V, Access Time=5ms, Height=1.75mm, Interface=SPI, Max Operating Temperature=85°C, Memory Size=2MB, Memory Type=FLASH, NexarPartId=75645707, RoHS=Non-Compliant, Schedule B="8542320070, 8542320070"

## Via types
v1: diameter 0.3, hole 0.15, TOP to BOTTOM, 72 vias

## Nets (pads, with @x,y where several pads share a name; then routed paths per layer and width w, separated by ;. In a path a pad name is that pad's centre, name@x,y a point inside that pad or via, vN(x,y) a via of type N, cw(c..) or ccw(c..) an arc to the next point about the centre after c; other vN are vias at no path point)
+3V3: 3V3.TP1 C1.2 C2.1 C5.2 C14.1 C15.1 C16.1 C17.1 C18.2 C19.1 IC1.9 IC1.10 L1.1 R1.2 R5.2 R6.2 R8.1 RN1.1 RN1.2 RN1.3 RN1.4 U1.5 U2.5 U2.8 U3.1 U3.10 U4.3 U4.7 U4.8 | length 73.1
  TOP w0.254: C18.2@7.75,11.5 7.837,11.413 7.837,10.284 R8.1 7.673,9.19 8.025,8.837 v1(8.025,8.825) ; C18.2@7.75,11.75 8.5,11.75 8.75,12 L1.1 11.25,12 C17.1@11.75,12.5 ; v1(11.3,10.3) 11.309,10.291 11.838,10.291 11.847,10.3 C16.1 ; C16.1@11.907,10.266 C17.1 ; IC1.9@24.278,6.8 IC1.10@25.2,6.8 ; IC1.10@25.225,6.796 25.225,5.875 26,5.1 27,5.1 27.287,4.813 ; v1(27.3,5.9) 27.3,4.825 27.6,4.525 ; 27.6,4.5 27.6,4.057 C14.1 ; C15.1@27.654,2.146 C14.1@27.654,4.003 ; v1(27.675,1.475) C15.1
  BOTTOM w0.254: 3V3.TP1@2.3,4 2.3,3.69 2.629,3.362 C19.1 ; 3V3.TP1@2.4,4 2.491,3.909 6.391,3.909 v1(6.4,3.9) ; U4.8 7.266,6.334 U4.7@7.3,6.3 ; U4.7@7.4,7 7.365,7.035 7.365,8.165 v1(8.025,8.825) 8.635,9.435 U4.3 ; v1(11.3,10.3) 11.312,10.3 11.612,10 12.175,10 R1.2@12.2,10.025 ; v1@11.3,10.312 11.3,13.504 12.471,14.675 13.25,14.675 R5.2@13.3,14.625 ; R6.2 13.225,3.625 13.675,4.075 v1@15.7,4.075 ; v1@13.175,13.038 13.184,13.029 13.184,12.914 13.725,12.373 16.727,12.373 17.127,11.973 17.127,11.527 17.2,11.454 RN1.4@17.2,10 ; C2.1 14.643,1.75 14.752,1.859 14.752,2.152 15.7,3.1 v1@15.7,4.05 ; U2.8 15.587,4.237 v1@15.7,4.125 ; U3.10 16.9,15.65 16.948,15.602 16.968,15.602 17.117,15.453 17.117,15.213 17.13,15.2 U3.1@17.2,15.2 ; v1@17.05,2.725 17.25,2.925 U2.5 ; U3.1@17.2,15.15 17.499,15.15 cw(c17.499,14.896) 17.678,15.076 18.302,14.452 18.883,13.871 19.391,13.871 19.462,13.8 C5.2@19.5,13.8 ; C5.2 19.529,13.9 20,13.9 20.5,14.4 v1@20.5,16.4 ; U1.5 22.619,12.531 22.619,11.656 23.625,10.65 26.2,10.65 C1.2@27.29,11.74 ; C1.2 C1.2@27.29,11.74 ; v1(27.3,5.9) 27.29,5.89 C1.2@27.29,11.74
  other v1: 17,2.7 15.69,4.1 13.175,13.05 20.5,16.373
A-CS: RN1.7 U2.12 | length 7.7
  BOTTOM w0.254: U2.12@16.25,6.575 16.25,6.775 13.773,9.252 13.773,10.677 14.05,10.954 RN1.7
A-SDO/ADR: R1.1 R2.2 U2.1 | length 18.4
  PWR w0.254: v1(12.334,10.925) 12.809,11.4 16,11.4 17.896,9.504 17.896,6.904 ; 17.9,6.9 v1(19.6,5.2)
  BOTTOM w0.254: v1(12.334,10.925) 12.877,10.382 12.877,10.025 R1.1@13,9.902 ; R2.2 12.851,7.5 13.027,7.676 R1.1@13.027,9.9 ; U2.1 19.2,6.5 19.6,6.1 v1(19.6,5.2)
B-CS: RN1.8 U3.6 | length 6.4
  TOP w0.254: v1(14.197,11.899) 14.197,11.903 13.725,12.375 13.725,13.461 v1(14.2,13.936)
  BOTTOM w0.254: v1(14.197,11.899) 14.642,11.454 RN1.8 ; v1(14.2,13.936) 14.2,13.948 14.902,14.65 U3.6
B-SDO/ADR: R4.2 R5.1 U3.5 | length 5.9
  BOTTOM w0.254: R4.2 12.25,12.85 13.275,13.875 R5.1@13.375,13.875 ; R5.1@13.25,13.8 13.3,13.75 13.3,13.549 13.449,13.4 14.325,13.4 15.06,14.135 U3.5
CS: IC1.40 U4.1 | length 30
  TOP w0.254: v1(19.3,12.8) 19.309,12.809 19.309,13.216 IC1.40
  GND w0.254: v1(5.327,13) 6.854,14.527 22.868,14.527 cw(c22.868,14.273) 23.02,14.476 cw(c22.868,14.273) 23.047,14.453 24.197,13.303 cw(c24.017,13.124) 24.271,13.124 24.271,12.476 cw(c24.017,12.476) 24.197,12.297 24.074,12.174 cw(c23.895,12.354) 23.895,12.1 20.205,12.1 cw(c20.205,12.354) 20.026,12.174 19.926,12.174 v1(19.3,12.8)
  BOTTOM w0.254: v1(5.327,13) 5.843,12.995 cw(c5.841,12.741) 6.02,12.921 ; 6.021,12.921 6.095,12.846 U4.1
D-LED: IC1.41 LED1.4 | length 13.4
  TOP w0.254: v1(18.446,12.798) 18.455,12.807 18.507,12.807 18.795,13.095 IC1.41 ; LED1.4 22.541,3.549 22.551,3.559 23.372,3.559 23.413,3.6 v1(23.425,3.6)
  PWR w0.254: v1(18.446,12.798) 18.446,10.829 23.425,5.85 v1(23.425,3.6)
GND: C1.1 C2.2 C3.1 C4.2 C5.1 C6.1 C7.2 C8.2 C10.2 C11.2 C12.2 C13.2 C14.2 C15.2 C16.2 C17.2 C19.2 DS1.2 GND.TP1 IC1.6 IC1.12 IC1.14 IC1.26 IC1.30 IC1.56 IC1.57 IC1.58 IC1.59 IC1.60 IC1.61 IC1.62 IC1.63 IC1.64 IC1.65 IC1.66 IC1.67 IC1.68 IC1.69 IC1.70 IC1.71 IC2.1 J1.5 J2.1 J2.3 J2.4 LED1.3 MODE.1 R2.1 R3.1 R4.1 R9.2 RESET.1 U1.2 U2.6 U2.7 U3.3 U3.8 U3.9 U4.4 | length 150.3
  TOP w0.254: v1(2.775,7.725) 2.787,7.725 2.989,7.523 3.91,7.523 J1.5 ; v1(2.8,14.8) 3.5,15.5 C4.2 5.987,15.5 6.412,15.925 7.275,15.925 R3.1@7.3,15.9 ; v1(4.35,3.325) 5.963,4.938 8.213,4.938 9.025,5.75 9.025,6.248 8.975,6.248 8.977,6.25 IC2.1 ; v1(6.075,1.125) 6.6,1.65 7.798,1.65 C12.2 C11.2 11.352,2.2 C10.2@13.6,2.2 ; R9.2 6.374,12.581 7,13.207 9.989,13.207 10.143,13.053 12.447,13.053 12.6,12.9 C17.2@12.6,12.4 ; v1(12,9.2) 12.009,9.209 12.405,9.209 12.7,9.504 C16.2@12.7,10.2 ; C16.2@12.6,10.2 12.702,10.302 12.702,10.698 12.827,10.823 12.827,11.973 12.7,12.1 12.7,12.464 C17.2 ; C13.2 v1(13.7,6) ; C13.2@12.7,6 12.7,5.3 13.399,4.601 ; 13.399,4.601 ccw(c13.578,4.781) 13.578,4.527 16.324,4.527 16.502,4.349 C8.2 16.5,4.024 16.391,3.914 16.391,2 C7.2 ; C10.2 13.65,2.05 C7.2@16.371,2.05 ; v1(16.022,9.053) IC1.30 ; IC1.26 16.547,13.053 v1(16.65,12.95) ; IC1.57@19,10.4 19.078,10.478 IC1.59@20.1,10.478 ; IC1.56 IC1.60 IC1.62 ; IC1.59@20.1,10.5 v1(20.193,10.5) IC1.59 IC1.63 IC1.65 ; v1(20.15,4.6) 20.475,4.6 21.245,5.37 IC1.6 ; IC1.58 20.17,10.37 IC1.59@20.2,10.4 ; IC1.61 IC1.67@22.4,12.778 ; IC1.62@21.3,11.6 v1(21.32,11.62) IC1.62 ; IC1.67@22.4,12.8 22.47,12.73 IC1.66 ; IC1.64 IC1.65@22.47,10.4 ; IC1.66 IC1.62 ; IC1.65@22.5,10.4 v1(22.47,10.43) IC1.65 ; IC1.66@22.683,11.84 IC1.66 ; IC1.65@22.7,10.5 23.147,10.053 IC1.12 ; v1(23.4,2.9) 23.099,2.599 LED1.3 22.453,1.747 22.8,1.4 24.9,1.4 25.177,1.677 25.177,1.977 DS1.2@25.3,2.1 ; IC1.14@25.14,11.84 IC1.14@25.3,12 ; DS1.2@25.261,2.111 26.989,2.111 C15.2@27,2.1 ; IC1.12@25.4,10 26.097,10 26.245,9.851 IC1.68@26.245,6.8 ; IC1.14@25.4,12 25.497,12.097 26.097,12.097 26.245,12.245 IC1.70 ; v1(26.25,16.5) 26.248,16.498 26.248,15.41 26.25,15.407 IC1.70 ; v1(26.297,6.703) IC1.68@26.3,6.7 ; IC1.68@26.397,6.703 IC1.69 ; C14.2 26.897,4.003 C15.2@26.897,2.103 ; IC1.71@28.8,15.5 28.703,15.403 IC1.70 ; IC1.65 IC1.66
  BOTTOM w0.254: C19.2@1.893,1.75 2.002,1.641 2.002,1.491 2.256,1.237 5.016,1.237 5.825,2.046 MODE.1@5.825,2.2 ; C6.1 1.938,15.786 1.938,15.212 2.35,14.8 v1@2.725,14.8 ; C19.2@1.9,1.75 1.9,1.809 1.85,1.859 1.85,2.65 1.125,3.375 1.125,5.313 2.493,6.681 2.493,7.431 2.775,7.713 v1(2.775,7.725) ; v1(8.25,15.825) 8.25,15.425 8.575,15.1 9.136,15.1 RESET.1 9.993,15.007 10.8,14.2 10.8,11.9 10.1,11.2 U4.4@10.1,10.853 ; R2.1 12.5,6.725 13.25,5.975 v1@13.65,5.975 ; R4.1 13.123,11.652 13.151,11.652 13.291,11.512 v1(13.3,10.9) ; v1(14.75,16.373) 14.971,16.152 16.639,16.152 ; v1(15.325,0.85) 15.325,1.696 C2.2 15.4,1.771 15.4,2.225 16.3,3.125 U2.7@16.3,4.775 ; U3.8 U3.9 ; U3.8@15.9,15.7 U3.8@15.935,15.665 ; v1(16.022,9.053) 16.248,8.827 18.052,8.827 18.273,9.048 18.273,11.848 18.725,12.3 19.7,12.3 v1(20.178,12.778) ; U2.7 16.702,4.838 16.725,4.814 U2.6@16.725,4.8 ; U3.9@16.385,15.665 16.448,15.728 16.448,15.961 16.639,16.152 ; v1(16.65,12.95) 16.65,12.962 16.9,13.212 U3.3@16.9,14.198 ; C5.1 18.814,14.629 17.291,16.152 16.639,16.152 ; J2.1 J2.1@22.375,6.143 ; U1.2 23.5,14.207 23.273,13.98 23.273,11.977 23.83,11.42 25.495,11.42 27.2,13.125 28.169,13.125 ; J2.3 26.297,7.871 v1(26.297,6.703) 26.297,2.897 J2.4@26.275,2.875 ; v1(26.25,16.5) 27.5,16.5 28.129,15.871 28.129,14.859 C3.1@28.238,14.75 ; C3.1@28.2,14.7 28.169,14.669 28.169,13.125 ; C1.1 28.169,12.041 28.169,13.125
MISO: IC1.34 U4.2 | length 19.4
  TOP w0.254: IC1.34 20.998,8.305 20.998,9.323 v1(21,9.325)
  PWR w0.254: v1(10.3,13.5) 18.348,13.5 18.873,12.975 18.873,11.027 20.566,9.334 20.991,9.334 v1(21,9.325)
  BOTTOM w0.254: U4.2 7.365,12.665 7.8,13.1 10,13.1 10.3,13.4 v1(10.3,13.5)
MOSI: IC1.35 U4.5 | length 20
  TOP w0.254: v1(21.6,9.3) 21.609,9.291 21.609,8.789 IC1.35
  GND w0.254: v1(11.7,5) 13.4,3.3 20.3,3.3 21.6,4.6 v1(21.6,9.3)
  BOTTOM w0.254: U4.5 9.905,5.309 10.2,5.014 11.042,5.014 cw(c11.042,4.76) 11.047,5.014 v1(11.7,5)
NetC9_1: C9.1 IC2.8 L1.2 | length 12
  TOP w0.254: v1(5.379,6.55) 5.605,6.324 ccw(c5.785,6.504) 5.785,6.25 IC2.8 ; L1.2@10.2,10.1 11.647,8.653 C9.1 11.524,7.909 11.393,7.909 cw(c11.393,8.163) 11.387,7.909 v1(10.5,7.929)
  GND w0.254: v1(5.379,6.55) 7.85,6.55 8.91,7.61 cw(c9.089,7.43) 8.937,7.633 cw(c9.089,7.43) 9.089,7.684 10.15,7.684 ccw(c10.15,7.938) 10.329,7.758 v1(10.5,7.929)
NetC9_2: C9.2 IC2.7 | length 11.1
  TOP w0.254: v1(5.4,7.55) 6.178,6.826 cw(c6.005,6.64) 6.181,6.823 ; 6.182,6.823 ccw(c6.359,7.004) 6.359,6.75 IC2.7 ; v1(12.6,8.8) 12.6,8.077 C9.2
  GND w0.254: v1(5.4,7.55) 7.745,7.55 ccw(c7.745,7.804) 7.924,7.624 8.582,8.282 ; 8.582,8.282 cw(c8.761,8.102) 8.609,8.305 cw(c8.761,8.102) 8.761,8.356 12.156,8.356 v1(12.6,8.8)
NetC10_1: C10.1 C11.1 C12.1 D2.1 IC2.2 IC2.3 | length 13.6
  TOP w0.254: D2.1 5.341,1.946 ccw(c5.341,2.2) 5.52,2.02 6.426,2.926 cw(c6.605,2.746) 6.453,2.949 cw(c6.605,2.746) 6.605,3 7.149,3 C12.1@8,3.25 ; C12.1@8.025,3.275 8.2,3.1 13.477,3.1 13.5,3.077 C10.1@13.5,3 ; IC2.2 9.331,6.75 cw(c9.33,6.496) 9.509,6.677 10.676,5.51 cw(c10.496,5.33) 10.699,5.483 ; IC2.2@9.068,6.752 IC2.3 ; 10.699,5.482 cw(c10.496,5.33) 10.75,5.33 C11.1@10.75,3.75
NetC13_1: C13.1 IC2.4 | length 3.6
  TOP w0.254: IC2.4 9.645,7.75 cw(c9.645,7.496) 9.824,7.676 10.75,6.75 11.441,6.059 11.848,6.059 C13.1
NetC18_1: C18.1 IC2.5 R8.2 R9.1 | length 6.9
  TOP w0.254: R9.1 6.374,11.126 6.6,10.9 R8.2@6.6,10.1 ; R9.1@6.4,11.8 6.9,11.8 7.1,12 7.1,12.4 7.3,12.6 C18.1 ; R8.2 6.669,8.231 7.076,7.824 ; 7.076,7.824 ccw(c7.255,8.004) 7.255,7.75 IC2.5
NetDS1_1: DS1.1 R7.1 | length 2.8
  TOP w0.254: DS1.1@24.4,2 24.381,2.019 24.381,2.781 25.331,3.731 R7.1
NetIC1_22: IC1.22 MODE.2 R6.1 | length 36.6
  TOP w0.254: v1(19,16.4) 19.245,16.155 IC1.22
  GND w0.254: v1(12.5,1.773) 23.268,1.773 23.295,1.8 ccw(c23.295,2.054) 23.447,1.851 ccw(c23.295,2.054) 23.474,1.874 25.334,3.734 ccw(c25.154,3.913) 25.357,3.761 ccw(c25.154,3.913) 25.408,3.913 25.408,13.235 25.108,13.535 23.308,15.335 23.264,15.335 ccw(c23.095,15.146) 23.247,15.349 ccw(c23.095,15.146) 23.095,15.4 20.105,15.4 cw(c20.105,15.654) 19.926,15.474 ; v1(19,16.4) 19.926,15.474
  BOTTOM w0.254: MODE.2 12,2.5 R6.1@12.4,2.9 ; v1(12.5,1.773) R6.1
NetIC1_33: IC1.33 R7.2 | length 10
  TOP w0.254: IC1.33 v1(19.897,8.303) ; v1(24.075,5.4) 24.2,5.4 24.581,5.019 R7.2
  GND w0.254: v1(19.897,8.303) 19.897,9.197 20.452,9.752 22.348,9.752 22.9,9.2 22.9,6.6 24.052,5.448 24.052,5.435 24.087,5.4 v1@24.096,5.4
RESET: C6.2 IC1.19 RESET.2 RST.TP1 | length 30.2
  TOP w0.254: v1(22,16.4) 22.245,16.155 IC1.19
  BOTTOM w0.254: RST.TP1 3.692,8.792 4.5,9.6 4.5,13.9 5.1,14.5 RESET.2@5.7,14.5 ; C6.2 3.971,15.829 4.8,15 RESET.2@5.8,15 ; RESET.2 6.707,15.007 8.527,16.827 21.573,16.827 v1(22,16.4)
SCK: IC1.1 U4.6 | length 10.6
  TOP w0.254: v1(13.7,5.2) 14.224,5.724 16.027,5.724 16.176,5.873 16.176,6.48 IC1.1
  BOTTOM w0.254: U4.6 8.635,5.409 9.644,4.4 12.9,4.4 v1(13.7,5.2)
SCL: IC1.3 RN1.5 U2.13 U3.2 | length 22.2
  TOP w0.254: IC1.3 18.3,6.873 18.3,6.049 18.449,5.9 18.951,5.9 19.127,5.724 19.127,4.673 v1(19.4,4.4)
  GND w0.254: v1(15.9,8.175) 15.9,5.7 17.2,4.4 v1(19.4,4.4)
  BOTTOM w0.254: RN1.5 16.204,10 15.749,10 15.5,9.751 15.5,8.575 v1(15.9,8.175) 16.475,7.6 16.757,7.318 16.757,6.669 U2.13 ; RN1.5@16.3,10 16.373,9.927 16.373,9.527 16.669,9.231 17.72,9.231 17.869,9.38 17.869,14.231 17.5,14.6 17.213,14.6 17.165,14.648 U3.2
SDA: IC1.2 RN1.6 U2.14 U3.4 | length 23.7
  TOP w0.254: IC1.2 17.245,6.045 18.091,5.2 v1(18.7,5.2)
  GND w0.254: v1(14.2,10.5) 14.2,11.082 14.624,11.506 14.624,12.776 14.6,12.8 ; v1(14.2,12.8) 14.6,12.8 ; v1(18.7,5.2) v1(18.7,9.3) 18.691,9.309 18.691,9.409 15.3,12.8 14.6,12.8
  BOTTOM w0.254: v1(14.2,12.8) 15.495,12.8 ccw(c15.495,13.054) 15.647,12.851 ccw(c15.495,13.054) 15.674,12.874 15.946,13.146 15.946,13.177 16.196,13.427 16.227,13.427 16.326,13.526 ccw(c16.146,13.705) 16.4,13.705 U3.4@16.4,14.2 ; v1@14.225,10.5 14.271,10.454 RN1.6 ; U2.14 17.25,7.25 18.7,8.7 v1(18.7,9.3)
SH: C4.1 D1.1 J1.MP1 J1.MP2 J1.MP3 J1.MP4 J1.MP5 J1.MP6 R3.2 | length 26.3
  TOP w0.254: J1.MP3@1.25,12.5 1.675,12.925 C4.1 ; J1.MP6@1.308,4.692 J1.MP5 J1.MP4 J1.MP3@1.308,12.5 ; J1.MP3 3.184,12.7 J1.MP1@3.567,12.317 ; J1.MP6@1.75,4.5 2.131,4.881 3.184,4.881 3.857,5.554 J1.MP2 ; J1.MP1@3.5,12.25 J1.MP1@4.007,12.25 ; J1.MP1 4.007,12 4,12.007 4,13.25 4.5,13.75 6.5,13.75 7.25,14.5 R3.2@7.25,15 ; R3.2 9.447,15.075 10.298,15.926 cw(c10.477,15.746) 10.477,16 D1.1@10.9,16
SWCLK: CLK.TP1 IC1.11 | length 29.6
  TOP w0.254: v1(23.9,9.3) 23.912,9.3 24.16,9.053 IC1.11
  GND w0.254: v1(3.85,14.254) 4.527,14.931 23.14,14.931 25.004,13.067 25.004,10.509 cw(c24.75,10.509) 24.953,10.357 cw(c24.75,10.509) 24.93,10.33 v1(23.9,9.3)
  BOTTOM w0.254: CLK.TP1 v1(3.85,14.254)
SWDIO: DIO.TP1 IC1.15 | length 29.5
  TOP w0.254: v1(23.7,12.8) 23.712,12.8 23.965,13.053 IC1.15
  PWR w0.254: v1(1,14.4) 1.827,15.227 12.479,15.227 13.179,14.527 22.073,14.527 23.691,12.909 23.691,12.809 v1(23.7,12.8)
  BOTTOM w0.254: v1(1,14.4) 1,12.396 DIO.TP1
USB_N: D1.2 IC1.55 J1.2 | length 63.9
  TOP w0.381: J1.2 4.848,9.4 4.856,9.393 v1(5.4,9.393) ; D1.2 9.359,16.079 10.18,16.9 12,16.9 12.797,16.103 13.429,16.103 13.433,16.1 v1(13.8,16.1) ; v1(13.8,7.235) 14.713,7.235 14.736,7.212 14.936,7.212 IC1.55
  GND w0.381: v1(5.4,9.393) 4.646,9.393 3.665,8.411 3.665,6.037 4.637,5.065 8.863,5.065 10.379,6.581 11.577,6.581 12.231,7.235 v1(13.8,7.235)
  PWR w0.381: v1(13.8,7.235) 14.165,7.235 14.565,6.835 14.565,2.637 15.651,1.551 15.987,1.215 23.613,1.215 25.2,2.802 25.2,13.159 25.014,13.345 22.477,15.882 14.281,15.882 14.103,16.06 13.84,16.06 v1(13.8,16.1)
USB_P: D1.3 IC1.54 J1.3 | length 59.6
  TOP w0.381: J1.3 4.848,8.75 4.856,8.758 v1(5.4,8.758) ; D1.3 9.359,14.079 10.109,14.828 12.023,14.828 12.663,15.468 13.166,15.468 13.17,15.465 13.8,15.465 v1(13.84,15.425) ; v1(13.8,7.87) 14.713,7.87 14.736,7.893 14.936,7.893 IC1.54
  GND w0.381: v1(5.4,8.758) 4.909,8.758 4.3,8.148 4.3,6.3 4.9,5.7 8.6,5.7 10.116,7.216 11.314,7.216 11.968,7.87 v1(13.8,7.87)
  PWR w0.381: v1(13.8,7.87) 14.428,7.87 15.2,7.098 15.2,2.9 15.502,2.598 16.1,2 16.25,1.85 23.35,1.85 24.565,3.065 24.565,12.896 22.214,15.247 14.018,15.247 v1(13.84,15.425)
VBAT: C3.2 J2.2 U1.1 U1.3 | length 18.5
  BOTTOM w0.254: J2.2@21.4,4.7 21.318,4.7 20.473,5.545 20.473,9.909 20.804,10.24 20.804,13.899 cw(c21.058,13.899) 20.855,14.051 cw(c21.058,13.899) 20.878,14.078 21.626,14.826 cw(c21.805,14.646) 21.653,14.849 cw(c21.805,14.646) 21.805,14.9 U1.1 ; U1.1@22.55,15.3 22.55,15.87 cw(c22.804,15.87) 22.804,16.124 24.196,16.124 cw(c24.196,15.87) 24.45,15.87 U1.3 24.526,14.824 ccw(c24.706,15.004) 24.706,14.75 C3.2@27.25,14.75
VBUS: C8.1 FB1.2 IC1.31 LED1.2 | length 12.7
  TOP w0.254: v1(16.675,8.207) 16.684,8.215 17.608,8.215 IC1.31 ; v1(18,2.8) 18,3.305 17.281,4.024 C8.1 18.626,4.024 18.9,3.75 FB1.2@18.9,3.6 ; FB1.2@19.25,3.5 21.455,3.5 LED1.2
  PWR w0.254: v1(16.675,8.207) 16.675,4.125 v1(18,2.8)
VUSB: C7.1 D1.4 D2.2 FB1.1 J1.1 | length 52.2
  TOP w0.254: v1(1,1.9) 1.951,1.9 2.026,1.826 D2.2 ; D2.2@2.6,1.8 3.3,1.8 4.527,0.573 11.673,0.573 12.4,1.3 16.8,1.3 17.1,1.6 17.1,1.971 C7.1 ; J1.1 v1(5.35,10.05) ; D1.4 12.429,14.029 v1(12.5,14.1) ; C7.1@17.2,2 17.9,2 18.225,2.325 FB1.1
  GND w0.254: v1@5.35,10.071 5.371,10.05 8.45,10.05 v1(12.5,14.1)
  PWR w0.254: v1(1,1.9) 1,10.8 4.235,14.035 cw(c4.414,13.855) 4.262,14.058 cw(c4.414,13.855) 4.414,14.109 12.435,14.109 cw(c12.434,13.855) v1(12.5,14.1)
pads on no net: IC1.4 IC1.5 IC1.7 IC1.8 IC1.13 IC1.16 IC1.17 IC1.18 IC1.20 IC1.21 IC1.23 IC1.24 IC1.25 IC1.27 IC1.28 IC1.29 IC1.32 IC1.36 IC1.37 IC1.38 IC1.39 IC1.42 IC1.43 IC1.44 IC1.45 IC1.46 IC1.47 IC1.48 IC1.49 IC1.50 IC1.51 IC1.52 IC1.53 IC2.6 J1.4 LED1.1 U1.4 U2.2 U2.3 U2.4 U2.9 U2.10 U2.11 U3.7
copper on no net: | length 95
  BOTTOM w0.254: 0,0 30,0 30,17.5 0,17.5 0,0

## Polygon pours and split planes (outlines as drawn)
GND on BOTTOM "NONET_L-01_P-001" (solid, remove dead copper, pour order 4): 0.3,17.2 29.7,17.2 29.7,15.9 25.8,15.9 25.8,6.2 29.7,6.2 29.7,0.3 0.3,0.3
GND on GND "NONET_L-01_P-001" (solid, remove dead copper, pour order 7): 0.3,17.25 29.7,17.25 29.703,17.247 29.703,15.95 25.8,15.95 25.8,6.25 29.7,6.25 29.7,0.35 0.3,0.35
+3V3 on TOP "NONET_L-01_P-001" (solid, remove dead copper, pour order 10): 29.7,0.3 0.3,0.3 0.3,17.2 29.7,17.2 29.7,15.9 25.8,15.9 25.8,6.2 29.7,6.2
+3V3 on PWR "NONET_L-01_P-001" (solid, remove dead copper, pour order 5): 0.3,17.25 29.7,17.25 29.7,15.95 25.8,15.95 25.8,6.25 29.7,6.25 29.7,0.35 0.3,0.35

## Other copper
Multi-Layer:
  the board outline again, w0.254

## Silkscreen, mask and mechanical layers (free items; w line width, h text height)
Top Overlay:
  lines w0.254: 0.5,0.5 29.5,0.5 29.5,17 0.5,17 0.5,0.5
Bottom Overlay:
  lines w0.254: 0.5,0.4 29.6,0.4 29.6,17 0.5,17 0.5,0.4 ; 11.6,9.5 13.6,9.5 13.6,12.3 11.6,12.3 11.6,9.5
  text "ADR 0/1" at 14.31,9.6 h1 r270
  text "-" at 21.808,7.854 h1.52 r90
  text "+" at 21.8,1.854 h1.52 r90